# Altium PCB 3V3_5V_BuckConverter.PcbDoc
Units mil, origin at the board's own origin, x right, y up, seen from the top; angles counter-clockwise.
Board outline 2670 x 1445 mil, 2 copper layers (Top Layer, Bottom Layer); 34 components, 18 nets, 104 pads, 37 vias.
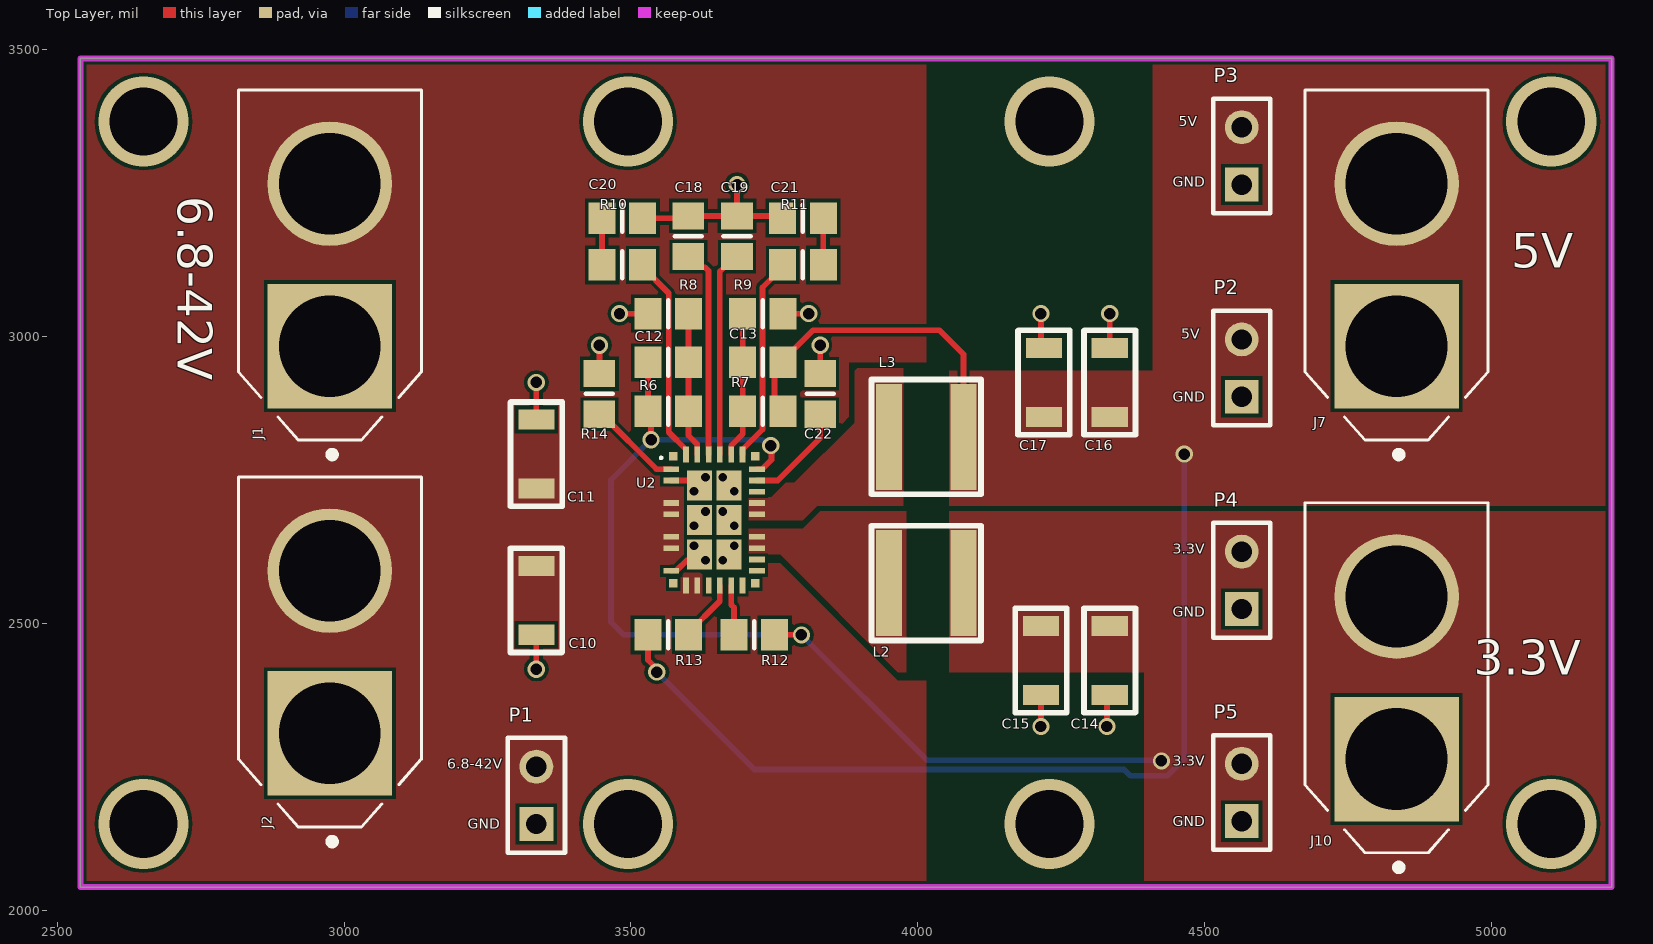
[diagram p0: Top Layer view]
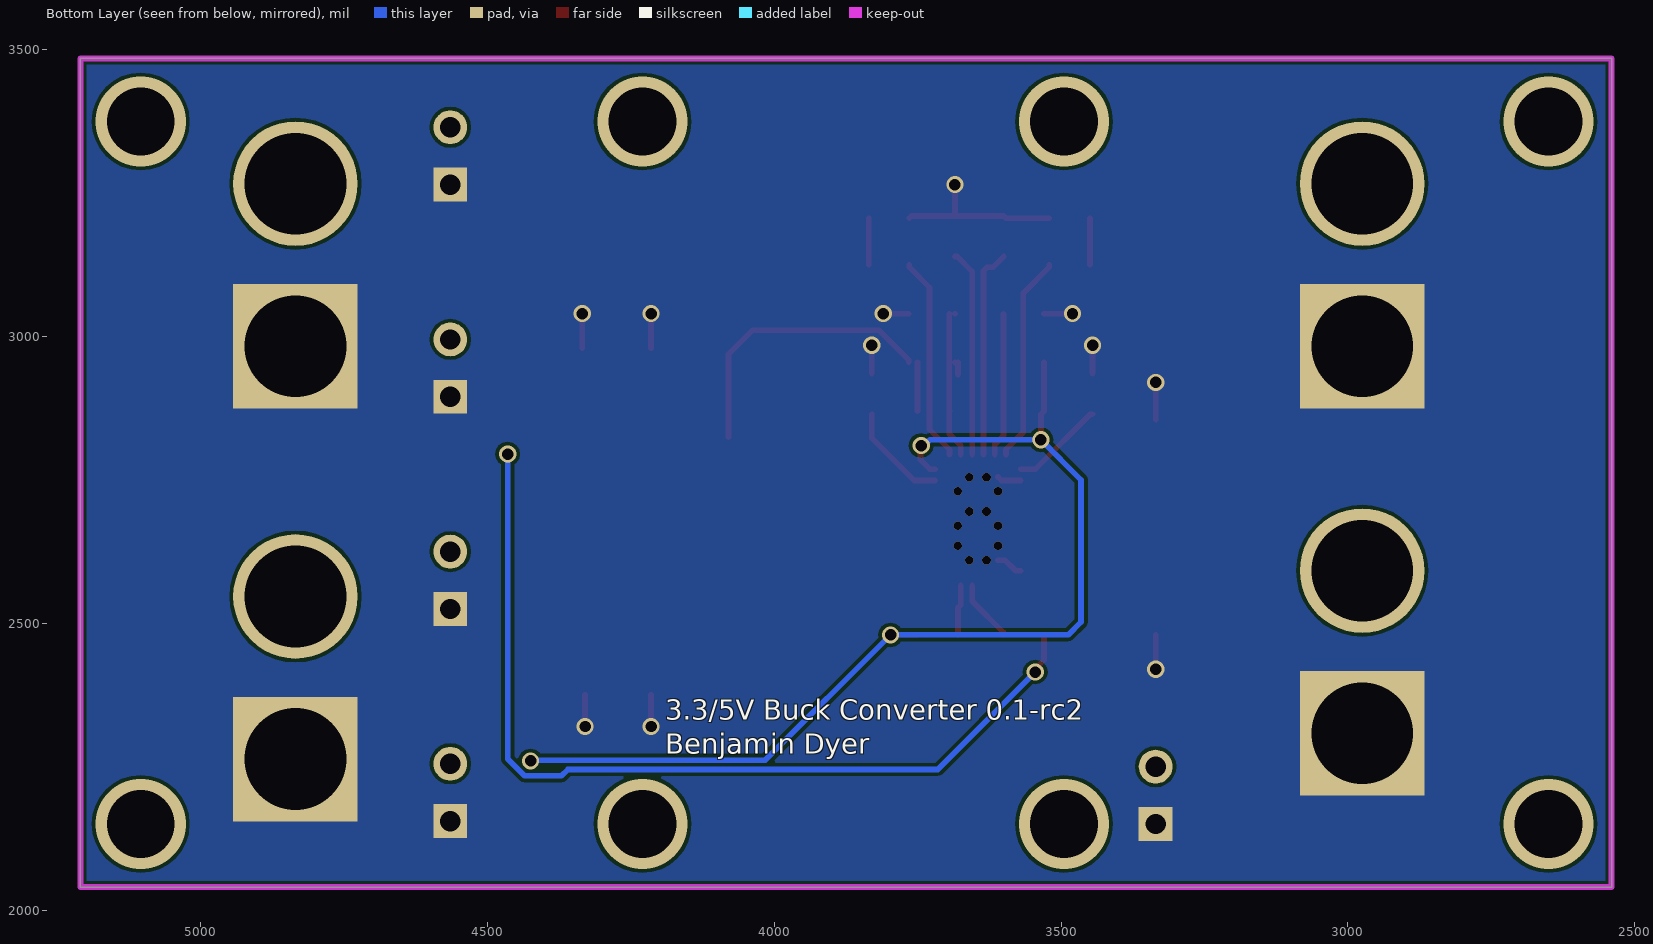
[diagram p1: Bottom Layer view, seen from below]

## Layer stack, top to bottom
Top Solder: solder mask 0.4, Solder Resist, Dk 3.5
Top Layer: signal copper 1.4
Dielectric 1: dielectric 12.6, FR-4, Dk 4.8
Bottom Layer: signal copper 1.4
Bottom Solder: solder mask 0.4, Solder Resist, Dk 3.5

## Board outline
2540,2040 5210,2040 5210,3485 2540,3485

## Design rules (kind name [scope] priority, off if disabled: settings)
Clearance [All] p1: gap=6 ignorepadtopadclearanceinfootprint=FALSE
PolygonConnect [All] p1: connectstyle=Direct reliefconductorwidth=10 reliefentries=4 polygonreliefangle="90 Angle" airgapwidth=10
RoutingVias [All] p1: holewidth=15 width=15 viastyle="Through Hole" minholewidth=15 minwidth=15 maxholewidth=50 maxwidth=50
SolderMaskExpansion [All] p1: expansion=4 istentingtop=FALSE
Width [All] p1: maxlimit=10 minlimit=10 preferedwidth=10
30 further rules are at their usual default settings.

## Classes and differential pairs
component class Connectors: J1 J2 J7 J10 P1 P2 P3 P4 P5
component class 3V3_5V_BuckConverter: C10 C11 C12 C13 C14 C15 C16 C17 C18 C19 C20 C21 C22 L2 L3 R6 R7 R8 R9 R10 R11 R12 R13 R14 U2

## Components (designator, comment, footprint, x,y, rotation, side; value= is the part's Value field where it differs from the comment)
C10 "Cap" 1206 3335,2540 r90 top value=4.7uF
C11 "Cap" 1206 3335,2795 r270 top value=4.7uF
C12 "Cap" 6-0805_N 3565,2955 r180 top value=4.7uF
C13 "Cap" 6-0805_N 3730,2955 r0 top value=4.7uF
C14 "1206" 1206 4335,2435 r90 top value=47uF
C15 "1206" 1206 4215,2435 r90 top value=47uF
C16 "1206" 1206 4335,2920 r270 top value=47uF
C17 "1206" 1206 4220,2920 r270 top value=47uF
C18 "Cap" 6-0805_N 3600,3175 r270 top value=10nF
C19 "Cap" 6-0805_N 3685,3175 r270 top value=10nF
C20 "Cap" 6-0805_N 3485,3206.5 r180 top value=220pF
C21 "Cap" 6-0805_N 3800,3206.5 r0 top value=220pF
C22 "Cap" 6-0805_N 3830,2900 r270 top value=1uF
J1 "XT60-M" *AMASS_XT60-M 2975,3125 r90 top
J2 "XT60-M" *AMASS_XT60-M 2975,2450 r90 top
J7 "XT60-M" *AMASS_XT60-M 4835,3125 r90 top
J10 "XT60-M" *AMASS_XT60-M 4835,2405 r90 top
L2 "Inductor" xfl5030-102 4015,2570 r0 top value=1uH
L3 "Inductor" xfl5030-102 4015,2825 r180 top value=1uH
P1 "Header 2" HDR1X2 3335,2150 r90 top
P2 "Header 2" HDR1X2 4565,2895 r90 top
P3 "Header 2" HDR1X2 4565,3265 r90 top
P4 "Header 2" HDR1X2 4565,2525 r90 top
P5 "Header 2" HDR1X2 4565,2155 r90 top
R6 "Res1" 6-0805_N 3565,2870 r0 top value=1M
R7 "Res1" 6-0805_N 3730,2870 r180 top value=1M
R8 "Res1" 6-0805_N 3565,3040 r180 top value=316k
R9 "Res1" 6-0805_N 3730,3040 r0 top value=191k
R10 "Res1" 6-0805_N 3485,3125 r180 top value=15k
R11 "Res1" 6-0805_N 3800,3125 r180 top value=15k
R12 "Res1" 6-0805_N 3715,2480 r0 top value=100k
R13 "Res1" 6-0805_N 3565,2480 r0 top value=100k
R14 "Res1" 6-0805_N 3445,2900 r90 top value=15k
U2 "LT8650SEV#PBF" *QFN50P600X400X103-32N240X440 3645.2,2680.16 r0 top

## Footprints (in the part's own frame and the unit in brackets; to place one, negate y for a bottom-side part, rotate by r counter-clockwise, add the part's x,y. Pads: shape width x height; smd on the part's side, far side on the other; paste and mask are expansions set on the pad)
6-0805_N [mm] "Chip Resistor, Body 2.0x1.2mm, IPC Medium Density"
  rect 1.2x1.4 smd: 1(-0.9,0) 2(0.9,0)
  silkscreen extent 0,-0.6 0,0.6, body extent -1.07,-0.7 1.07,0.7, height 0.7
1206 [mil]
  rect 35x63 smd: 1(-60,0) 2(60,0)
  silkscreen extent -91,-45 91,45
*AMASS_XT60-M [mm]
  rect 5.516x5.516 hole 4.5: 1(-3.6,0)
  round 5.516 hole 4.5: 2(3.6,0)
  silkscreen extent -8.55,-4.05 7.75,4.05
*QFN50P600X400X103-32N240X440 [mm]
  rect 0.7x0.25 smd: 1(-1.9,2.25) 2(-1.9,1.75) 4(-1.9,0.75) 5(-1.9,0.25) 7(-1.9,-0.75) 8(-1.9,-1.25) 10(-1.9,-2.25) 17(1.9,-2.25) 18(1.9,-1.75) 19(1.9,-1.25) 20(1.9,-0.75) 22(1.9,0.25) 23(1.9,0.75) 24(1.9,1.25) 25(1.9,1.75) 26(1.9,2.25)
  rect 0.25x0.7 smd: 11(-1.25,-2.9) 12(-0.75,-2.9) 13(-0.25,-2.9) 14(0.25,-2.9) 15(0.75,-2.9) 16(1.25,-2.9) 27(1.25,2.9) 28(0.75,2.9) 29(0.25,2.9) 30(-0.25,2.9) 31(-0.75,2.9) 32(-1.25,2.9)
  rect 1.1x1.33 smd: 33(-0.65,1.53) 34(0.65,1.53) 35(-0.65,0) 36(0.65,0) 37(-0.65,-1.53) 38(0.65,-1.53)
  rect 0.375x0.375 smd: P1(-1.813,2.812) P2(1.813,2.812) P3(-1.813,-2.812) P4(1.813,-2.812)
  silkscreen extent -2.4,2.7 -2.3,2.8
HDR1X2 [mm] "Connector; Header; 2 Position"
  rect 1.5x1.5 hole 0.9: 1(0,0)
  round 1.5 hole 0.9: 2(2.54,0)
  silkscreen extent -1.27,-1.27 3.81,1.27
xfl5030-102 [mil]
  rect 46x185 smd: 1(-65,0) 2(65,0)
  silkscreen extent -96,-100 96,100, body extent -115,-115 115,115, height 122

## Part data
C10 C11 C12 C13 C18 C19 C20 C21 C22: "Capacitor", LatestRevisionDate=17-Jul-2002, LatestRevisionNote="Re-released for DXP Platform.", PackageDescription="Radial Cap, Thru-Hole; 2 Leads; 0.3 in Pin Spacing", PackageReference=RAD-0.3, Published=8-Jun-2000, Publisher="Altium Limited"
C14 C15 C16 C17: library part Cap, "Capacitor", LatestRevisionDate=17-Jul-2002, LatestRevisionNote="Re-released for DXP Platform.", PackageDescription="Radial Cap, Thru-Hole; 2 Leads; 0.3 in Pin Spacing", PackageReference=RAD-0.3, Published=8-Jun-2000, Publisher="Altium Limited"
J1 J2 J7 J10: "Plug; DC supply; XT60; male; PIN: 2; for cable; soldered; 30A; 500V", Package="Package Analog Devices", Availability=Unavailable, MF=AMASS, MP=XT60-M, Price=None, SnapEDA_Link=https://www.snapeda.com/parts/XT60-M/AMASS/view-part/2883912/?ref=snap
P1 P2 P3 P4 P5: "Header, 2-Pin", LatestRevisionDate=17-Jul-2002, LatestRevisionNote="Re-released for DXP Platform.", Publisher="Altium Limited"
R6 R7 R8 R9 R10 R11 R12 R13 R14: "Resistor", LatestRevisionDate=17-Jul-2002, LatestRevisionNote="Re-released for DXP Platform.", PackageDescription="Axial Device, Thru-Hole; 2 Leads; 0.3 in Pin Spacing", PackageReference=AXIAL-0.3, Published=8-Jun-2000, Publisher="Altium Limited"
U2: "Conv DC-DC 3V to 42V Synchronous Step Down Dual-Out 0.8V 4A/4A Automotive 28-Pin LQFN EP Tray", Package="LQFN -32 Analog Devices", Digi-Key_Part_Number=LT8650SEV#PBF-ND, Digi-Key_Purchase_URL=https://www.digikey.com/product-detail/en/linear-technology-analog-devices/LT8650SEV-PBF/LT8650SEV-PBF-ND/7702365?utm_source=snapeda&utm_medium=aggregator&utm_campaign=symbol, MF="Analog Devices", MP=LT8650SEV#PBF, SnapEDA_Link=https://www.snapeda.com/parts/LT8650SEV%23PBF/Analog%20Devices/view-part/4330709/?ref=snap
L2 L3: Code_IEC=1005, Code_JEITA=0402, LatestRevisionDate=29-May-2009, LatestRevisionNote="IPC-7351 Footprint Added.", PackageDescription="Chip Inductor", PackageReference=0402-A, Published=8-Jun-2000, Publisher="Altium Limited"

## Via types
v1: diameter 30, hole 20, Top Layer to Bottom Layer, tented both sides, 17 vias
v2: diameter 15, hole 15, Top Layer to Bottom Layer, tented both sides, 12 vias
v3: diameter 157.48, hole 118.11, Top Layer to Bottom Layer, 8 vias

## Nets (pads, with @x,y where several pads share a name; then routed paths per layer and width w, separated by ;. In a path a pad name is that pad's centre, name@x,y a point inside that pad or via, vN(x,y) a via of type N, cw(c..) or ccw(c..) an arc to the next point about the centre after c; other vN are vias at no path point)
3V3: C12.2 C14.2 C15.2 J10.2 L2.2 P4.2 P5.2 R6.1 R12.2 U2.26 | length 1861.4
  Top Layer w10: C12.2 R6.1 3535,2864.57 v1(3535,2820) ; U2.26 3728.7,2768.74 3745,2785.04 3745,2808.88 v1(3743.93,2809.95) ; R12.2 3750.61,2479.82 v1(3797.21,2479.82)
  Bottom Layer w10: v1(3743.93,2809.95) 3738.64,2809.95 3728.59,2820 v1(3535,2820) 3465,2750 3465,2502.25 3487.43,2479.82 v1(3797.21,2479.82) 4016.03,2261 4424,2261 v1(4425,2260)
5V: C13.2 C16.2 C17.2 J7.2 L3.1 P2.2 P3.2 R7.1 R13.1 | length 2196.8
  Top Layer w10: R13.1 3529.57,2435.84 3545,2420.41 v1(3545,2415) ; R7.1@3750.43,2870 C13.2@3750.43,2955 ; C13.2 3765.43,2958.94 3817.5,3011 4038.14,3011 4080,2969.14 L3.1
  Bottom Layer w10: v1(3545,2415) 3715,2245 4360,2245 4371,2234 4435.77,2234 4465,2263.23 v1(4465,2795)
GND: C10.1 C11.1 C14.1 C15.1 C16.1 C17.1 C18.1 C19.1 C20.1 C21.1 C22.1 J1.1 J2.1 J7.1 J10.1 P1.1 P2.1 P3.1 P4.1 P5.1 R8.2 R9.2 R14.2 U2.2 U2.10 U2.33 U2.34 U2.35 U2.36 U2.37 U2.38 | length 939.5
  Top Layer w10: v1(3335,2420) C10.1 ; C11.1 v1(3335,2920) ; R14.2 v1(3445,2985) ; v1(3480,3040) R8.2 ; C20.1 3596.06,3206.5 C18.1 C19.1 ; U2.10 3579.09,2591.57 3597.52,2610 U2.37@3610,2610 ; U2.2 3604.06,2749.06 U2.33@3610,2755 ; v1(3685,3265) C19.1 ; C21.1 3760.63,3210.43 C19.1 ; R9.2 v1(3810,3040) ; C22.1 v1(3830,2985) ; v1(4215,2320) C15.1 ; C17.1@4215,2980 v1(4215,3040) ; v1(4330,2320) C14.1@4330,2375 ; C16.1 v1(4335,3040)
  other v2: 3630,2610 3660,2610 3610,2635 3680,2635 3610,2670 3680,2670 3630,2695 3660,2695 3610,2730 3680,2730 3630,2755 3660,2755
NetC12_1: C12.1 R6.2 R8.1 U2.31 | length 252
  Top Layer w10: R8.1 C12.1 R6.2 3600.43,2827.44 3615.59,2812.28 3615.59,2794.41 U2.31
NetC13_1: C13.1 R7.2 R9.1 U2.28 | length 278.1
  Top Layer w10: U2.28 3674.8,2794.41 3674.8,2809.8 3695,2830 3695,2869.57 R7.2 3695,2870.43 3695,2954.57 C13.1 3695,2955.43 3695,3039.57 R9.1 ; C13.1@3679.57,2933.75 C13.1@3679.57,2955 ; R9.1@3684.57,3040 R9.1@3685,3039.57 ; C13.1@3685,2954.57 3684.57,2955 C13.1@3685,2955.43
NetC18_2: C18.2 U2.30 | length 366
  Top Layer w10: C18.2 3618.62,3120.94 3629.06,3120.94 3635.35,3114.65 U2.30
NetC19_2: C19.2 U2.29 | length 360
  Top Layer w10: U2.29 3655.04,3113.54 3681.06,3139.57 C19.2
NetC20_2: C20.2 R10.2 | length 81.5
  Top Layer w10: R10.2 C20.2
NetC21_2: C21.2 R11.1 | length 81.5
  Top Layer w10: R11.1 C21.2
NetC22_2: C22.2 U2.25 | length 182.1
  Top Layer w10: U2.25 3755.82,2749.06 3830,2823.23 C22.2
NetL2_1: L2.1 U2.19 U2.20
NetL3_2: L3.2 U2.22 U2.23
NetR10_1: R10.1 U2.32 | length 362
  Top Layer w10: R10.1 3520.43,3121.06 3565.81,3075.69 3565.81,2833.21 3595.98,2803.03 U2.32
NetR11_2: R11.2 U2.27 | length 359.7
  Top Layer w10: U2.27 3694.41,2803.03 3729.19,2837.81 3729.19,3085.69 3764.57,3121.06 R11.2
NetR12_1: R12.1 U2.15 | length 88
  Top Layer w10: U2.15 3674.72,2532.34 3679.57,2527.5 R12.1
NetR13_2: R13.2 U2.14 | length 108.6
  Top Layer w10: R13.2 3600.43,2483.94 3654.96,2538.46 3654.96,2565.91 U2.14
NetR14_1: R14.1 U2.1 | length 165.1
  Top Layer w10: R14.1 3448.94,2864.57 3544.68,2768.82 3570.32,2768.82 U2.1
Vbatt: C10.2 C11.2 J1.2 J2.2 P1.2 U2.4 U2.5 U2.7 U2.8 U2.11 U2.12
pads on no net: U2.13 U2.16 U2.17 U2.18 U2.24 U2.P1 U2.P2 U2.P3 U2.P4
copper on no net:
  other v3: 2650,2150 3495,2150 4230,2150 5105,2150 2650,3375 3495,3375 4230,3375 5105,3375

## Polygon pours and split planes (outlines as drawn)
Vbatt on Top Layer "VBATT_L01_P006" (solid, pour order 6): 3695,2605 3695,2725 3700,2730 3740,2730 3765,2755 3775,2755 3833.75,2813.75 3880,2860 3880,2955 4015,2955 4015,3485 2540,3485 2540,2040 4015,2040 4015,2400 3965,2400 3760,2605
3V3 on Top Layer "3V3_L01_P010" (solid, pour order 10): 4055,2415 4055,2695 5210,2695 5210,2040 4395,2040 4395,2415
5V on Top Layer "5V_L01_P009" (solid, pour order 9): 4055,2705 5210,2705 5210,3485 4410,3485 4410,2940 4055,2940
NetL3_2 on Top Layer "NETL3_2_L01_P008" (solid, pour order 8): 3705,2680 3705,2720 3745,2720 3770,2745 3785,2745 3890,2850 3890,2940 3895,2945 3975,2945 3975,2705 3825,2705 3800,2680
NetL2_1 on Top Layer "NETL2_1_L01_P007" (solid, pour order 7): 3705,2620 3705,2665 3800,2665 3830,2695 3980,2695 3980,2415 3965,2415 3760,2620
GND on Bottom Layer "GND_L02_P011" (solid, pour order 11): 2540,2040 2540,3485 5210,3485 5210,2040

## Keep-outs
Keep-Out Layer:
  lines w10: 2540,2040 2540,3485 5210,3485 5210,2040 5005,2040 3125,2040 2540,2040

## Silkscreen, mask and mechanical layers (free items; w line width, h text height)
Top Overlay:
  text "5V" at 4455,3360.33 h30
  text "GND" at 4445,3255.33 h30
  text "6.8-42V" at 2710,3245 h60 r270
  text "5V" at 5035,3120 h60
  text "5V" at 4460,2990.33 h30
  text "GND" at 4445,2880.33 h30
  text "3.3V" at 4445,2615.33 h30
  text "GND" at 4445,2505.33 h30
  text "3.3V" at 4970,2410 h60
  text "3.3V" at 4445,2245.33 h30
  text "6.8-42V" at 3180,2240.33 h30
  text "GND" at 4445,2140.33 h30
  text "GND" at 3215,2135.33 h30
Bottom Overlay:
  text "3.3/5V Buck Converter 0.1-rc2 / Benjamin Dyer" at 4190,2260 h60
PolyDraw:
  lines w6: 2540,2040 4015,2040 4015,2400 3965,2400 3760,2605 3695,2605 3695,2725 3700,2730 3733.12,2730 3740,2730 3765,2755 3775,2755 3833.75,2813.75 3880,2860 3880,2955 4015,2955 4015,3485 2540,3485 2540,2040 ; 3705,2620 3705,2665 3800,2665 3830,2695 4015,2695 4015,2415 3965,2415 3760,2620 3745,2620 3705,2620 ; 3705,2680 3705,2720 3745,2720 3770,2745 3785,2745 3890,2850 3890,2940 3895,2945 4015,2945 4015,2705 3825,2705 3800,2680 3705,2680 ; 4035,2415 4035,2695 5210,2695 5210,2040 4395,2040 4395,2415 4035,2415 ; 4035,2705 4035,2940 4410,2940 4410,3485 5210,3485 5210,2705 4035,2705